# Altium PCB Smart WC.PcbDoc
Units mil, origin at the board's own origin, x right, y up, seen from the top; angles counter-clockwise.
Board outline 7381.89 x 4330.71 mil, 2 copper layers (Top Layer, Bottom Layer); 17 components, 56 nets, 210 pads, 15 vias.
Unrouted connection lines stored in the file: 1.
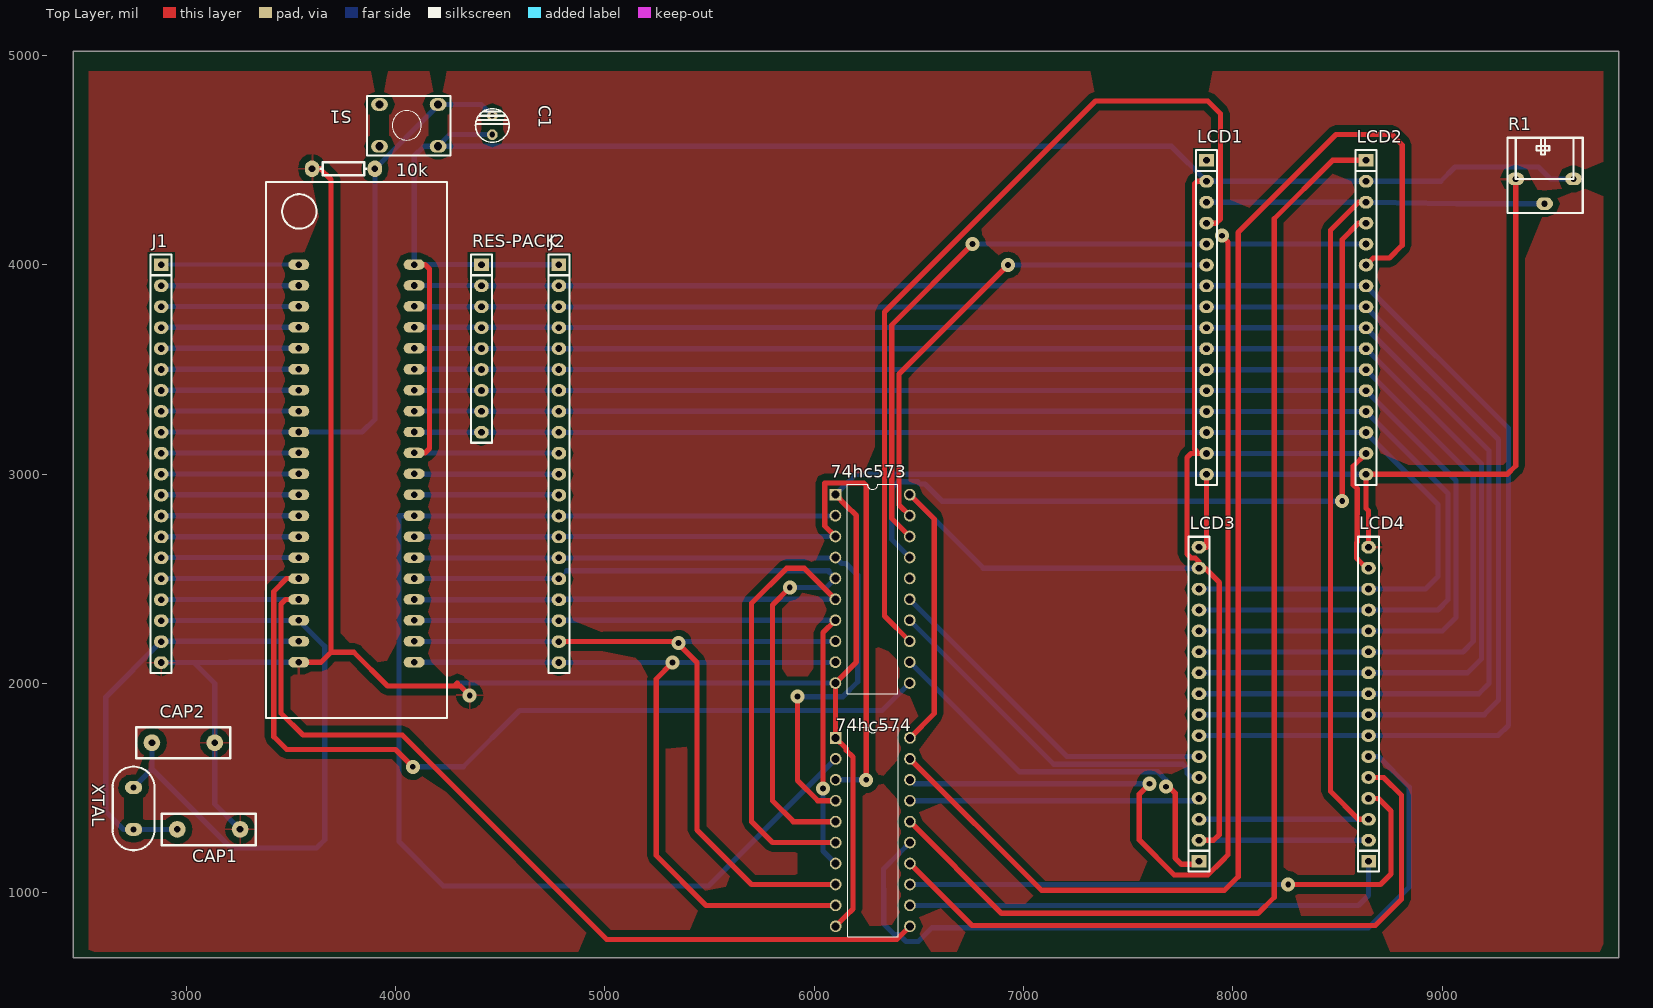
[diagram p0: Top Layer view]
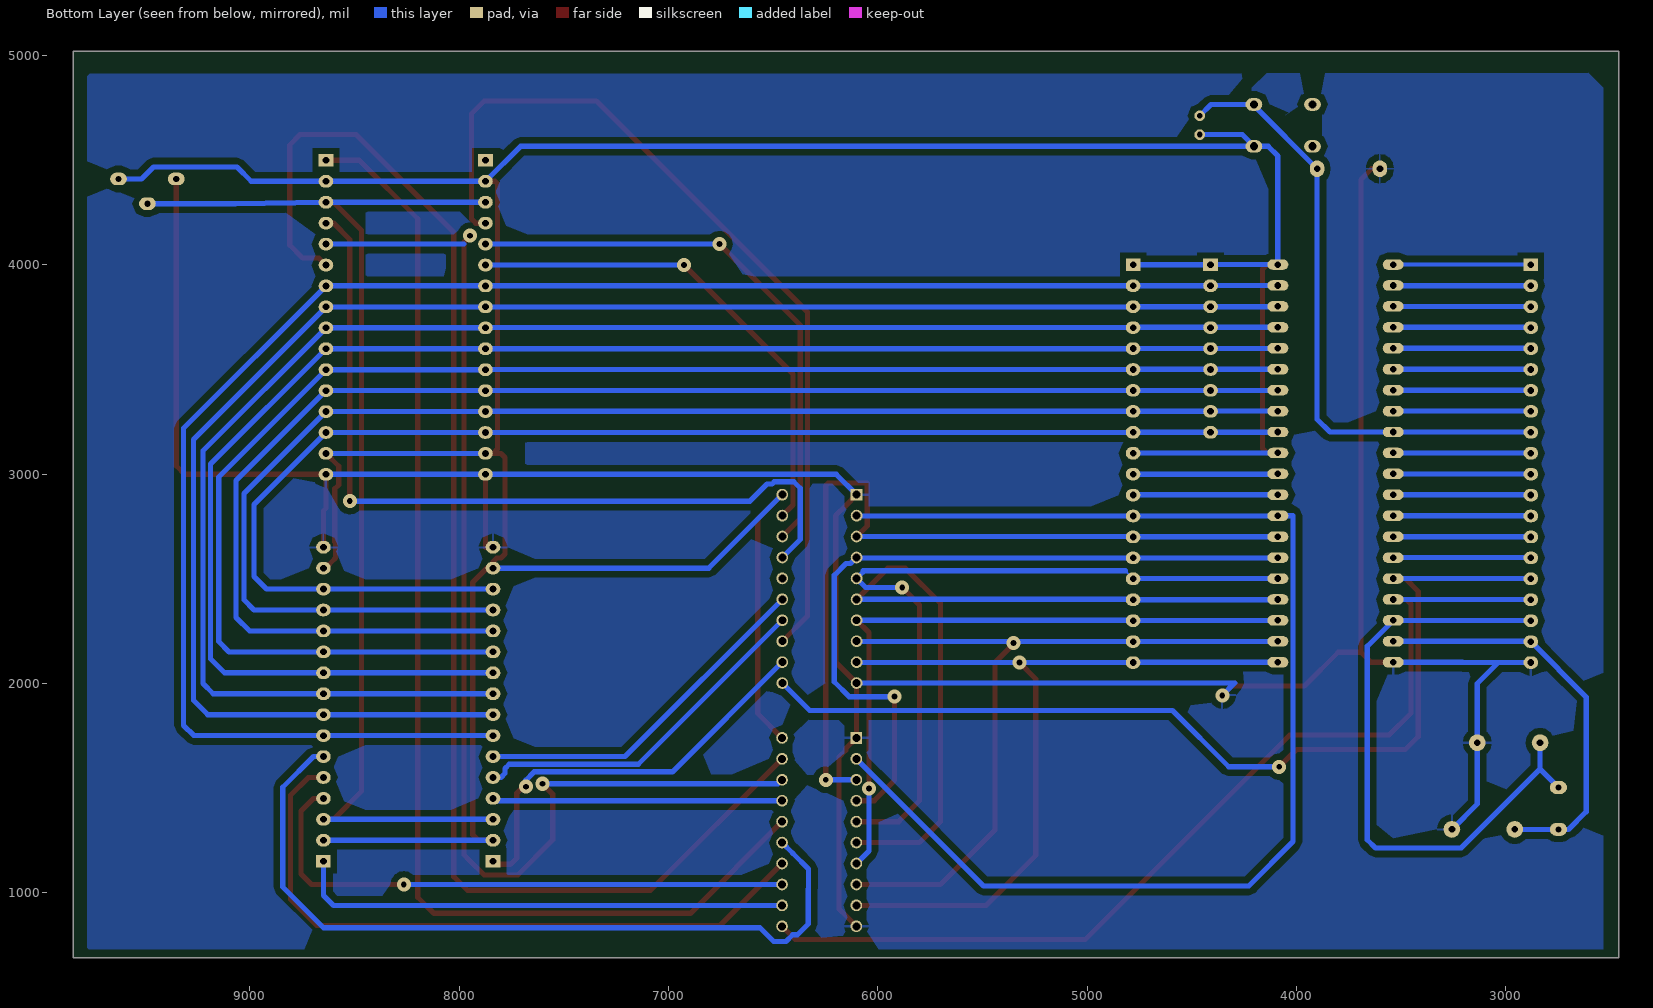
[diagram p1: Bottom Layer view, seen from below]

## Layer stack, top to bottom
Top Layer: signal copper 1.4
Dielectric: dielectric 12.6, FR-4, Dk 4.8
Bottom Layer: signal copper 1.4

## Board outline
2460.63,5019.69 9842.52,5019.69 9842.52,688.98 2460.63,688.98 2460.63,5019.69

## Design rules (kind name [scope] priority, off if disabled: settings)
Clearance Clearance_1 [InPolygon] p1: gap=30
Clearance [All] p2: gap=10
PolygonConnect [All] p1: connectstyle=Relief reliefconductorwidth=10 reliefentries=4 polygonreliefangle="90 Angle"
RoutingVias [All] p1: holewidth=28 width=66.93 viastyle="Through Hole" minholewidth=28 minwidth=50 maxholewidth=28 maxwidth=70.87
SilkscreenOverComponentPads [All] p1: minsilkscreentomaskgap=10
SolderMaskExpansion [All] p1: expansion=4
Width [All] p1: maxlimit=25 minlimit=20 preferedwidth=25
27 further rules are at their usual default settings.

## Components (designator, comment, footprint, x,y, rotation, side; value= is the part's Value field where it differs from the comment)
10k "RES" AXIAL0.3 3751,4459 r0 top
74hc573 "74hc573" DIP20 6101,2902 r0 top
74hc574 "74hc573" DIP20 6102,1740 r0 top
C1 "电解电容" CD4 4462,4622 r270 top
CAP1 "30pf" RAD0.3 3107,1303 r0 top
CAP2 "30pf" RAD0.3 2986,1717 r0 top
J1 "20PIN" SIP20 2880,4000 r270 top
J2 "20PIN" SIP20 4780,4000 r270 top
LCD1 "LCD1602" SIP16 7874,4499 r270 top
LCD2 "LCD1602" SIP16 8636,4499 r270 top
LCD3 "LCD1602" SIP16 7838,1151 r90 top
LCD4 "LCD1602" SIP16 8648,1151 r90 top
R1 "RESVR" VR 9351,4607 r0 top
RES-PACK "CON9" SIP9 4410,4000 r270 top
S1 "复位开关" KeyA 4243,4526 r180 top
XTAL "11.0592MHz" XTAL 2748,1403 r90 top
? "AT89S5X" LOCK40PIN 3380,4395 r0 top

## Footprints (in the part's own frame and the unit in brackets; to place one, negate y for a bottom-side part, rotate by r counter-clockwise, add the part's x,y. Pads: shape width x height; smd on the part's side, far side on the other; paste and mask are expansions set on the pad)
AXIAL0.3 [mil]
  oval 70x80 hole 32: 1(-150,0) 2(150,0)
  silkscreen extent -109,-30 109,30
CD4 [mm]
  round 1.3 hole 0.7: 1(0,0) 2(-2.286,0)
  silkscreen extent -3.16,-2.04 0.92,2.04
DIP20 [mil]
  rect 56x56 hole 38: 1(0,0)
  round 56 hole 38: 2(0,-100) 3(0,-200) 4(0,-300) 5(0,-400) 6(0,-500) 7(0,-600) 8(0,-700) 9(0,-800) 10(0,-900) 11(355,-900) 12(355,-800) 13(355,-700) 14(355,-600) 15(355,-500) 16(355,-400) 17(355,-300) 18(355,-200) 19(355,-100) 20(355,0)
  silkscreen extent 57,-950 298,50
KeyA [mil]
  oval 80x60 hole 39.37: 1(40,-40) 2(40,-240) 3(320,-240) 4(320,-40)
  silkscreen extent -20,-280 380,3
LOCK40PIN [mm]
  oval 2.54x1.27 hole 0.8: 1(4,-10) 2(4,-12.54) 3(4,-15.08) 4(4,-17.62) 5(4,-20.16) 6(4,-22.7) 7(4,-25.24) 8(4,-27.78) 9(4,-30.32) 10(4,-32.86) 11(4,-35.4) 12(4,-37.94) 13(4,-40.48) 14(4,-43.02) 15(4,-45.56) 16(4,-48.1) 17(4,-50.64) 18(4,-53.18) 19(4,-55.72) 20(4,-58.26) 21(18,-58.26) 22(18,-55.72) 23(18,-53.18) 24(18,-50.64) 25(18,-48.1) 26(18,-45.56) 27(18,-43.02) 28(18,-40.48) 29(18,-37.94) 30(18,-35.4) 31(18,-32.86) 32(18,-30.32) 33(18,-27.78) 34(18,-25.24) 35(18,-22.7) 36(18,-20.16) 37(18,-17.62) 38(18,-15.08) 39(18,-12.54) 40(18,-10)
  silkscreen extent 0,-65 22,0
RAD0.3 [mil]
  round 80 hole 32: 1(-150,0) 2(150,0)
  silkscreen extent -225,-75 225,75
SIP9 [mil]
  rect 60x70 hole 32: 1(0,0)
  oval 60x70 hole 32: 2(100,0) 3(200,0) 4(300,0) 5(400,0) 6(500,0) 7(600,0) 8(700,0) 9(800,0)
  silkscreen extent -50,-50 850,50
SIP16 [mil]
  rect 60x70 hole 32: 1(0,0)
  oval 60x70 hole 32: 2(100,0) 3(200,0) 4(300,0) 5(400,0) 6(500,0) 7(600,0) 8(700,0) 9(800,0) 10(900,0) 11(1000,0) 12(1100,0) 13(1200,0) 14(1300,0) 15(1400,0) 16(1500,0)
  silkscreen extent -50,-50 1550,50
SIP20 [mil]
  rect 60x70 hole 32: 1(0,0)
  oval 60x70 hole 32: 2(100,0) 3(200,0) 4(300,0) 5(400,0) 6(500,0) 7(600,0) 8(700,0) 9(800,0) 10(900,0) 11(1000,0) 12(1100,0) 13(1200,0) 14(1300,0) 15(1400,0) 16(1500,0) 17(1600,0) 18(1700,0) 19(1800,0) 20(1900,0)
  silkscreen extent -50,-50 1950,50
VR [mil]
  oval 80x60 hole 30: 1(0,-196.85) 2(275.59,-196.85) 3(137.8,-314.96)
  silkscreen extent -40,-360 320,0
XTAL [mil]
  oval 62x82 hole 28: 1(-100,0) 2(100,0)
  silkscreen extent -200,-100 200,100

## Part data
74hc573 74hc574: library part Component_1
R1: "Potent"
?: library part AT

## Via types
v1: diameter 66.93, hole 28, Top Layer to Bottom Layer, 15 vias

## Nets (pads, with @x,y where several pads share a name; then routed paths per layer and width w, separated by ;. In a path a pad name is that pad's centre, name@x,y a point inside that pad or via, vN(x,y) a via of type N, cw(c..) or ccw(c..) an arc to the next point about the centre after c; other vN are vias at no path point)
ALE: ?.30 J2.11 | length 691.9
  Bottom Layer w10: ?.30 ?.30@4089.96,3000
  Bottom Layer w25: ?.30@4089.96,3000 J2.11
GND: 10k.1 74hc573.1 74hc573.10 74hc574.1 74hc574.10 ?.20 CAP1.2 CAP2.2 J1.20 LCD1.16 LCD2.16 LCD3.16 LCD4.16 R1.1 | length 14375.8
  Top Layer w25: ?.20 3643.3,2101.3 3691,2149 ; 10k.1 3640,4459 3691,4408 3691,2149 ; 4295,2002 4281,1988 ; v1(4354,1943) 4309,1988 4281,1988 ; 74hc573.1 6152,2851 6201,2802 6201,2102 6152,2053 74hc573.10 6101,1871 6102,1870 74hc574.1 6153,1689 6153,1681 6185,1649 6185,923 6153,891 74hc574.10 ; LCD3.16 7874,2651 LCD1.16 ; LCD4.16 8648,2825 8636,2837 LCD2.16 9310,2999 9351,3040 R1.1 ; 3691,2149 3800,2149 3961,1988 4281,1988
  Bottom Layer w25: J1.20 3036,2100 ; CAP1.2 3136,1424 CAP2.2 3136,2000 3036,2100 ; ?.20 3208,2101.3 3206.7,2100 3036,2100 ; v1(4354,1943) 4295,2002 74hc573.10 ; 74hc573.1 6198,2999 LCD1.16 LCD2.16
LCD_E1: 74hc573.19 LCD1.6 | length 2381.9
  Top Layer w25: 74hc573.19 6405,2853 6405,3266 6405,3478 v1(6926,3999)
  Bottom Layer w25: v1(6926,3999) 7138,3999 LCD1.6
LCD_E2: 74hc574.19 LCD2.6 | length 6622.1
  Top Layer w25: 74hc574.19 7085,1012 7960,1012 8025,1077 8025,4155 8492,4622 8760,4622 8809,4573 8809,4094 8748,4033 8670,4033 LCD2.6
LCD_E3: 74hc573.15 LCD3.6 | length 1693.1
  Bottom Layer w25: 74hc573.15 7207,1651 LCD3.6
LCD_E4: 74hc574.15 LCD4.6 | length 3825.4
  Bottom Layer w25: 74hc574.15 6406,1189 6331,1114 6331,1018.75 6332,1017.75 6332,971.25 6332,851 6383,800 6406,800 6439,767 6497,767 6563,833 7084,833 8126,833 8647,833 8842,1028 8842,1504 8695,1651 LCD4.6
LCD_GND1: 74hc573.16
LCD_GND2: 74hc574.16 LCD2.1 | length 5748.9
  Top Layer w25: 74hc574.16 6895,902 8120,902 8197,979 8197,4220 8476,4499 LCD2.1
LCD_GND3: 74hc573.12 LCD3.1 | length 1988.7
  Top Layer w25: v1(7681,1507) 7694,1507 7724,1477 7724,1435 7724,1166 7754,1136 7823,1136 LCD3.1
  Bottom Layer w25: 74hc573.12 6980.2,1577.8 7638.8,1577.8 7641.2,1577.8 7681,1538 v1(7681,1507)
LCD_GND4: 74hc574.12 LCD4.1 | length 2373.9
  Bottom Layer w25: 74hc574.12 8600,940 8648,988 LCD4.1
LCD_RS1: 74hc573.13 LCD1.4 | length 4246.8
  Top Layer w25: 74hc573.13 6335,2323 6335,3774 7343,4782 7880,4782 7940,4722 7940,4219 7920,4199 LCD1.4
LCD_RS2: 74hc573.17 LCD2.4 | length 3966.3
  Top Layer w25: v1(8522,2871) 8522,2943 8522,4121 8600,4199 LCD2.4
  Bottom Layer w25: 74hc573.17 6405,2653 6370,2688 6370,2755.5 6370,2820.5 6370,2933 6401,2964 6494,2964 6505.5,2952.5 6528.5,2952.5 6610,2871 v1(8522,2871)
LCD_RS3: 74hc574.17 LCD3.4 | length 1385.6
  Bottom Layer w25: 74hc574.17 7148,1440 7827,1440 LCD3.4
LCD_RS4: 74hc574.13 LCD4.4 | length 2751.6
  Top Layer w25: v1(8264,1040) 8705,1040 8755,1090 8755,1391 8695,1451 LCD4.4
  Bottom Layer w25: 74hc574.13 v1(8264,1040)
LCD_RW1: 74hc573.18 LCD1.5 | length 2710.5
  Top Layer w25: 74hc573.18 6370,2788 6370,3637 6370,3713 v1(6756,4099)
  Bottom Layer w25: v1(6756,4099) 6832,4099 LCD1.5
LCD_RW2: 74hc574.18 LCD2.5 | length 5602.9
  Top Layer w25: v1(7602,1521) 7553,1472 7553,1252 7720,1085 7880,1085 7947,1152 7977,1182 7977,4109 v1(7947,4139)
  Bottom Layer w25: 74hc574.18 6476,1521 v1(7602,1521) ; 7978,4099 LCD2.5
LCD_RW3: 74hc573.14 LCD3.5 | length 1706.5
  Bottom Layer w25: 74hc573.14 7144,1614 7760,1614 7780,1594 7780,1571 7800,1551 LCD3.5
LCD_RW4: 74hc574.14 LCD4.5 | length 3211.6
  Top Layer w25: 74hc574.14 6753,844 8680,844 8805,969 8805,1466 8720,1551 LCD4.5
P00: ?.39 J2.2 LCD1.7 LCD2.7 LCD3.7 LCD4.7 RES-PACK.2 | length 9189.3
  Bottom Layer w10: RES-PACK.2@4408.7,3901.3 RES-PACK.2 ; LCD2.7@8635,3900 LCD2.7
  Bottom Layer w25: ?.39 RES-PACK.2@4408.7,3901.3 ; RES-PACK.2 J2.2 LCD2.7@8635,3900 ; LCD3.7 LCD4.7 9267,1751 9316,1800 9316,3219 LCD2.7 LCD1.7
P01: ?.38 J2.3 LCD1.8 LCD2.8 LCD3.8 LCD4.8 RES-PACK.3 | length 8149.1
  Bottom Layer w10: ?.38 ?.38@4089.96,3800 ; J2.3 J2.3@4781,3799
  Bottom Layer w25: ?.38@4089.96,3800 RES-PACK.3 J2.3 ; J2.3@4781,3799 LCD1.8 LCD2.8 9269,3166 9269,1920 9200,1851 LCD4.8 LCD3.8
P02: ?.37 J2.4 LCD1.9 LCD2.9 LCD3.9 LCD4.9 RES-PACK.4 | length 8058.3
  Bottom Layer w10: J2.4@4778.7,3701.3 J2.4 ; LCD1.9@7873,3700 LCD1.9
  Bottom Layer w25: ?.37 4248,3701.3 ; RES-PACK.4 4249.3,3700 4248,3701.3 ; J2.4@4778.7,3701.3 4248,3701.3 ; J2.4 LCD1.9@7873,3700 ; LCD3.9 LCD4.9 9174,1951 9223,2000 9223,3112 LCD2.9 LCD1.9
P03: ?.36 J2.5 LCD1.10 LCD2.10 LCD3.10 LCD4.10 RES-PACK.5 | length 7634.3
  Bottom Layer w10: ?.36 ?.36@4089.96,3600 ; J2.5 J2.5@4781,3599
  Bottom Layer w25: ?.36@4089.96,3600 RES-PACK.5 J2.5 ; J2.5@4781,3599 LCD1.10 LCD2.10 9187,3048 9187,2118 9120,2051 LCD4.10 LCD3.10
P04: ?.35 J2.6 LCD1.11 LCD2.11 LCD3.11 LCD4.11 RES-PACK.6 | length 7552.2
  Bottom Layer w10: J2.6@4778.7,3501.3 J2.6 ; LCD1.11@7873,3500 LCD1.11
  Bottom Layer w25: ?.35 4248,3501.3 ; RES-PACK.6 4249.3,3500 4248,3501.3 ; J2.6@4778.7,3501.3 4248,3501.3 ; J2.6 LCD1.11@7873,3500 ; LCD3.11 LCD4.11 9099,2151 9148,2200 9148,2987 LCD2.11 LCD1.11
P05: ?.34 J2.7 LCD1.12 LCD2.12 LCD3.12 LCD4.12 RES-PACK.7 | length 7062.9
  Bottom Layer w10: ?.34 ?.34@4089.96,3400 ; J2.7 J2.7@4781,3399
  Bottom Layer w25: ?.34@4089.96,3400 RES-PACK.7 J2.7 ; J2.7@4781,3399 LCD1.12 LCD2.12 9065,2970 9065,2316 9000,2251 LCD4.12 LCD3.12
P06: ?.33 J2.8 LCD1.13 LCD2.13 LCD3.13 LCD4.13 RES-PACK.8 | length 6820
  Bottom Layer w10: RES-PACK.8@4408.7,3301.3 RES-PACK.8 ; LCD1.13@7873,3300 LCD1.13
  Bottom Layer w25: ?.33 RES-PACK.8@4408.7,3301.3 ; RES-PACK.8 J2.8 LCD1.13@7873,3300 ; LCD3.13 LCD4.13 8979,2351 9028,2400 9028,2907 LCD2.13 LCD1.13
P07: ?.32 J2.9 LCD1.14 LCD2.14 LCD3.14 LCD4.14 RES-PACK.9 | length 6545.6
  Bottom Layer w10: ?.32 ?.32@4089.96,3200 ; J2.9 J2.9@4781,3199
  Bottom Layer w25: ?.32@4089.96,3200 RES-PACK.9 J2.9 ; J2.9@4781,3199 LCD1.14 LCD2.14 8980,2855 8980,2511 8920,2451 LCD4.14 LCD3.14
P10: ?.1 J1.1 | length 658
  Bottom Layer w10: J1.1 J1.1@2881.3,4001.3
  Bottom Layer w20: J1.1@2881.3,4001.3 ?.1
P11: ?.2 J1.2 | length 658
  Bottom Layer w25: J1.2 3536.18,3900 ?.2
P12: ?.3 J1.3 | length 658
  Bottom Layer w10: J1.3 J1.3@2881.3,3801.3
  Bottom Layer w25: J1.3@2881.3,3801.3 ?.3
P13: ?.4 J1.4 | length 658
  Bottom Layer w10: J1.4 J1.4@2881.3,3701.3
  Bottom Layer w25: J1.4@2881.3,3701.3 ?.4
P14: ?.5 J1.5 | length 658
  Bottom Layer w10: J1.5 J1.5@2881.3,3601.3
  Bottom Layer w25: J1.5@2881.3,3601.3 ?.5
P15: ?.6 J1.6 | length 658
  Bottom Layer w10: J1.6 J1.6@2881.3,3501.3
  Bottom Layer w25: J1.6@2881.3,3501.3 ?.6
P16: ?.7 J1.7 | length 658
  Bottom Layer w10: J1.7 J1.7@2881.3,3401.3
  Bottom Layer w25: J1.7@2881.3,3401.3 ?.7
P17: ?.8 J1.8 | length 658
  Bottom Layer w10: J1.8 J1.8@2881.3,3301.3
  Bottom Layer w25: J1.8@2881.3,3301.3 ?.8
P20: 74hc573.9 74hc574.9 ?.21 J2.20 | length 4699.6
  Top Layer w25: v1(5323,2100) 5245,2022 5245,1178 5483,940 74hc574.9
  Bottom Layer w10: J2.20@4778.7,2101.3 J2.20 ; 74hc573.9@6099,2100 74hc573.9
  Bottom Layer w25: ?.21 J2.20@4778.7,2101.3 ; J2.20 6099,2100 v1(5323,2100)
P21: 74hc573.8 74hc574.8 ?.22 J2.19 | length 4284.8
  Top Layer w25: J2.19 5340,2200 5440,2100 5440,1300 5700,1040 74hc574.8
  Bottom Layer w10: ?.22 ?.22@4089.96,2200 ; 74hc573.8@6099,2200 74hc573.8
  Bottom Layer w25: ?.22@4089.96,2200 J2.19 74hc573.8@6099,2200
  other v1: 5352,2193
P22: 74hc573.7 74hc574.7 ?.23 J2.18 | length 3225
  Top Layer w25: v1(6042,1498) 6042,2243 74hc573.7
  Bottom Layer w10: J2.18@4778.7,2301.3 J2.18 J2.18@4782,2302
  Bottom Layer w25: ?.23 J2.18@4778.7,2301.3 ; J2.18@4782,2302 74hc573.7 ; v1(6042,1498) 6042,1200 74hc574.7
P23: 74hc573.6 74hc574.6 ?.24 J2.17 | length 4031.6
  Top Layer w25: 74hc573.6 5953,2550 5867,2550 5700,2383 5700,1340 5800,1240 74hc574.6
  Bottom Layer w10: ?.24 ?.24@4089.96,2400 ; J2.17 J2.17@4782,2402
  Bottom Layer w25: ?.24@4089.96,2400 J2.17 ; J2.17@4782,2402 74hc573.6
P24: 74hc573.5 74hc574.5 ?.25 J2.16 | length 3677.9
  Top Layer w25: v1(5883,2458) 5800,2375 5800,1440 5900,1340 74hc574.5
  Bottom Layer w10: J2.16@4778.7,2501.3 J2.16 4818,2538
  Bottom Layer w25: ?.25 J2.16@4778.7,2501.3 ; 4818,2538 6069,2538 6069,2534 74hc573.5 6057,2458 v1(5883,2458)
P25: 74hc573.4 74hc574.4 ?.26 J2.15 | length 3604.2
  Top Layer w25: v1(5920,1937) 5920,1537 6017,1440 74hc574.4
  Bottom Layer w10: ?.26 ?.26@4089.96,2600 ; 74hc573.4@6099,2600 74hc573.4
  Bottom Layer w25: ?.26@4089.96,2600 J2.15 74hc573.4@6099,2600 ; v1(5920,1937) 6137,1937 6208,2008 6208,2516.5 6151.5,2573 6130,2573 74hc573.4
P26: 74hc573.3 74hc574.3 ?.27 J2.14 | length 4045.8
  Top Layer w25: 74hc573.3 6050,2753 6050,2958 6236,2958 6248,2946 v1(6248,1540)
  Bottom Layer w10: J2.14@4778.7,2701.3 J2.14 J2.14@4782,2702
  Bottom Layer w25: ?.27 J2.14@4778.7,2701.3 ; J2.14@4782,2702 74hc573.3 ; 74hc574.3 v1(6248,1540)
P27: 74hc573.2 74hc574.2 ?.28 J2.13 | length 6067.9
  Bottom Layer w10: ?.28 ?.28@4089.96,2800 ; 74hc573.2@6099,2800 74hc573.2
  Bottom Layer w25: ?.28 4016,2801.3 4016,1244.94 4227.87,1033.07 5495.07,1033.07 74hc574.2 ; ?.28@4089.96,2800 J2.13 74hc573.2@6099,2800
P30: ?.10 J1.10 | length 658
  Bottom Layer w10: J1.10 J1.10@2881.3,3101.3
  Bottom Layer w25: J1.10@2881.3,3101.3 ?.10
P31: ?.11 J1.11 | length 658
  Bottom Layer w10: J1.11 J1.11@2881.3,3001.3
  Bottom Layer w25: J1.11@2881.3,3001.3 ?.11
P32: ?.12 J1.12 | length 658
  Bottom Layer w10: J1.12 J1.12@2881.3,2901.3
  Bottom Layer w25: J1.12@2881.3,2901.3 ?.12
P33: ?.13 J1.13 | length 658
  Bottom Layer w10: J1.13 J1.13@2881.3,2801.3
  Bottom Layer w25: J1.13@2881.3,2801.3 ?.13
P34: ?.14 J1.14 | length 658
  Bottom Layer w10: J1.14 J1.14@2881.3,2701.3
  Bottom Layer w25: J1.14@2881.3,2701.3 ?.14
P35: ?.15 J1.15 | length 658
  Bottom Layer w10: J1.15 J1.15@2881.3,2601.3
  Bottom Layer w25: J1.15@2881.3,2601.3 ?.15
P36: 74hc573.11 ?.16 J1.16 | length 4765
  Top Layer w25: ?.16 3479.3,2501.3 3418,2440 3418,1746 3480,1684 3895,1684 4000,1684 4079,1605 v1@4082,1605
  Bottom Layer w10: J1.16 J1.16@2881.3,2501.3
  Bottom Layer w25: J1.16@2881.3,2501.3 ?.16 ; v1@4076,1602 4323,1602 4592,1871 4720,1871 6325,1871 74hc573.11
  other v1: 4082,1602
P37: 74hc574.11 ?.17 J1.17 | length 4751.2
  Top Layer w25: ?.17 3474.3,2401.3 3453,2380 3453,1858 3557,1754 4032,1754 5009,777 6394,777 74hc574.11
  Bottom Layer w10: J1.17 J1.17@2881.3,2401.3
  Bottom Layer w25: J1.17@2881.3,2401.3 ?.17
PSEN: ?.29 J2.12 | length 691.9
  Bottom Layer w10: J2.12@4778.7,2901.3 J2.12
  Bottom Layer w25: ?.29 J2.12@4778.7,2901.3
RESET: 10k.2 ?.9 C1.2 J1.9 S1.2 | length 2957
  Bottom Layer w10: J1.9 J1.9@2881.3,3201.3 ; S1.2@4203,4761 S1.2
  Bottom Layer w25: J1.9@2881.3,3201.3 ?.9 3840,3201.3 3901,3262.3 10k.2 S1.2@4203,4761 ; S1.2 4408,4766 C1.2
VCC: 74hc573.20 74hc574.20 ?.31 ?.40 C1.1 J2.1 J2.10 LCD1.2 LCD1.15 LCD2.2 LCD2.15 LCD3.2 LCD3.15 LCD4.2 LCD4.15 R1.2 RES-PACK.1 S1.1 | length 17318.3
  Top Layer w25: ?.31 4140,3101.3 4162,3123.3 4162,3980 4140.7,4001.3 ?.40 ; 74hc573.20 6573,2785 6573,1856 74hc574.20 ; LCD3.2 7907,1251 7933,1277 7935,1277 7935,2483 7867,2551 LCD3.15 7838,2581 7820,2599 7800,2599 7780,2619 7780,3079 7800,3099 7837,3099 ; LCD1.15 7837,3099 ; LCD1.2 7828,4399 7816,4387 7816,3120 7837,3099 ; LCD2.15 8575,3038 8575,2949 8594,2930 8594,2676.25 8590.5,2672.75 8590.5,2599 8594,2595.5 8638.5,2551 LCD4.15
  Bottom Layer w10: RES-PACK.1@4408.7,4001.3 RES-PACK.1 ; J2.10@4778.7,3101.3 J2.10
  Bottom Layer w25: ?.31 J2.10@4778.7,3101.3 ; RES-PACK.1@4408.7,4001.3 ?.40 4088.66,4520 4134.66,4566 S1.1 ; RES-PACK.1 J2.1 ; C1.1 4259,4622 S1.1 ; 74hc573.20 6807,2551 LCD3.15 ; LCD3.2 LCD4.2 ; LCD1.15 LCD2.15 ; R1.2 9516.85,4410.15 9460,4467 9061,4467 8993,4399 LCD2.2 LCD1.2 7707,4566 S1.1
VO: LCD1.3 LCD2.3 LCD3.3 LCD4.3 R1.3 | length 5567.8
  Top Layer w25: LCD2.3 8600,4299 8466.03,4165.03 8466.03,1484.97 8600,1351 LCD4.3
  Bottom Layer w25: LCD3.3 LCD4.3 ; LCD1.3 LCD2.3 9068.96,4292.04 R1.3
XTAL1: ?.19 CAP1.1 J1.19 XTAL.1 | length 1956.3
  Bottom Layer w10: J1.19 J1.19@2881.3,2201.3
  Bottom Layer w25: J1.19 2615.83,1935.83 2615.83,1387.17 2700,1303 XTAL.1 CAP1.1 ; J1.19@2881.3,2201.3 ?.19
XTAL2: ?.18 CAP2.1 J1.18 XTAL.2 | length 3005.6
  Bottom Layer w10: J1.18 J1.18@2881.3,2301.3
  Bottom Layer w25: XTAL.2 2836,1591 ; CAP2.1 2836,1591 ; J1.18@2881.3,2301.3 ?.18 3661.42,2177.36 3661.42,1253.42 3622,1214 3213,1214 2836,1591
pads on no net: LCD1.1 S1.3 S1.4

## Polygon pours and split planes (outlines as drawn)
GND on Top Layer "Bottom Layer-No Net" (solid): 2534,4924 9769,4924 9769,757 9808,718 2560,718 2534,692
GND on Bottom Layer "Bottom Layer-No Net" (solid): 2535,4917 2535,731 9770,731 9776,737 9776,4902 9765,4913

## Silkscreen, mask and mechanical layers (free items; w line width, h text height)
Bottom Solder:
  lines w10: 2449,683 2459,693 ; 9816.86,683 9842.52,708.66
  lines w50: 2449,683 9816.86,683 ; 2459,693 2459,4989 ; 2480.32,5016 9842.52,5016 9842.52,708.66